# Altium PCB FuenteCapacitiva.PcbDoc
Units mm, origin at the board's own origin, x right, y up, seen from the top; angles counter-clockwise.
Board outline 152.4 x 101.6 mm, 2 copper layers (Top Layer, Bottom Layer); 15 components, 9 nets, 34 pads, 0 vias.
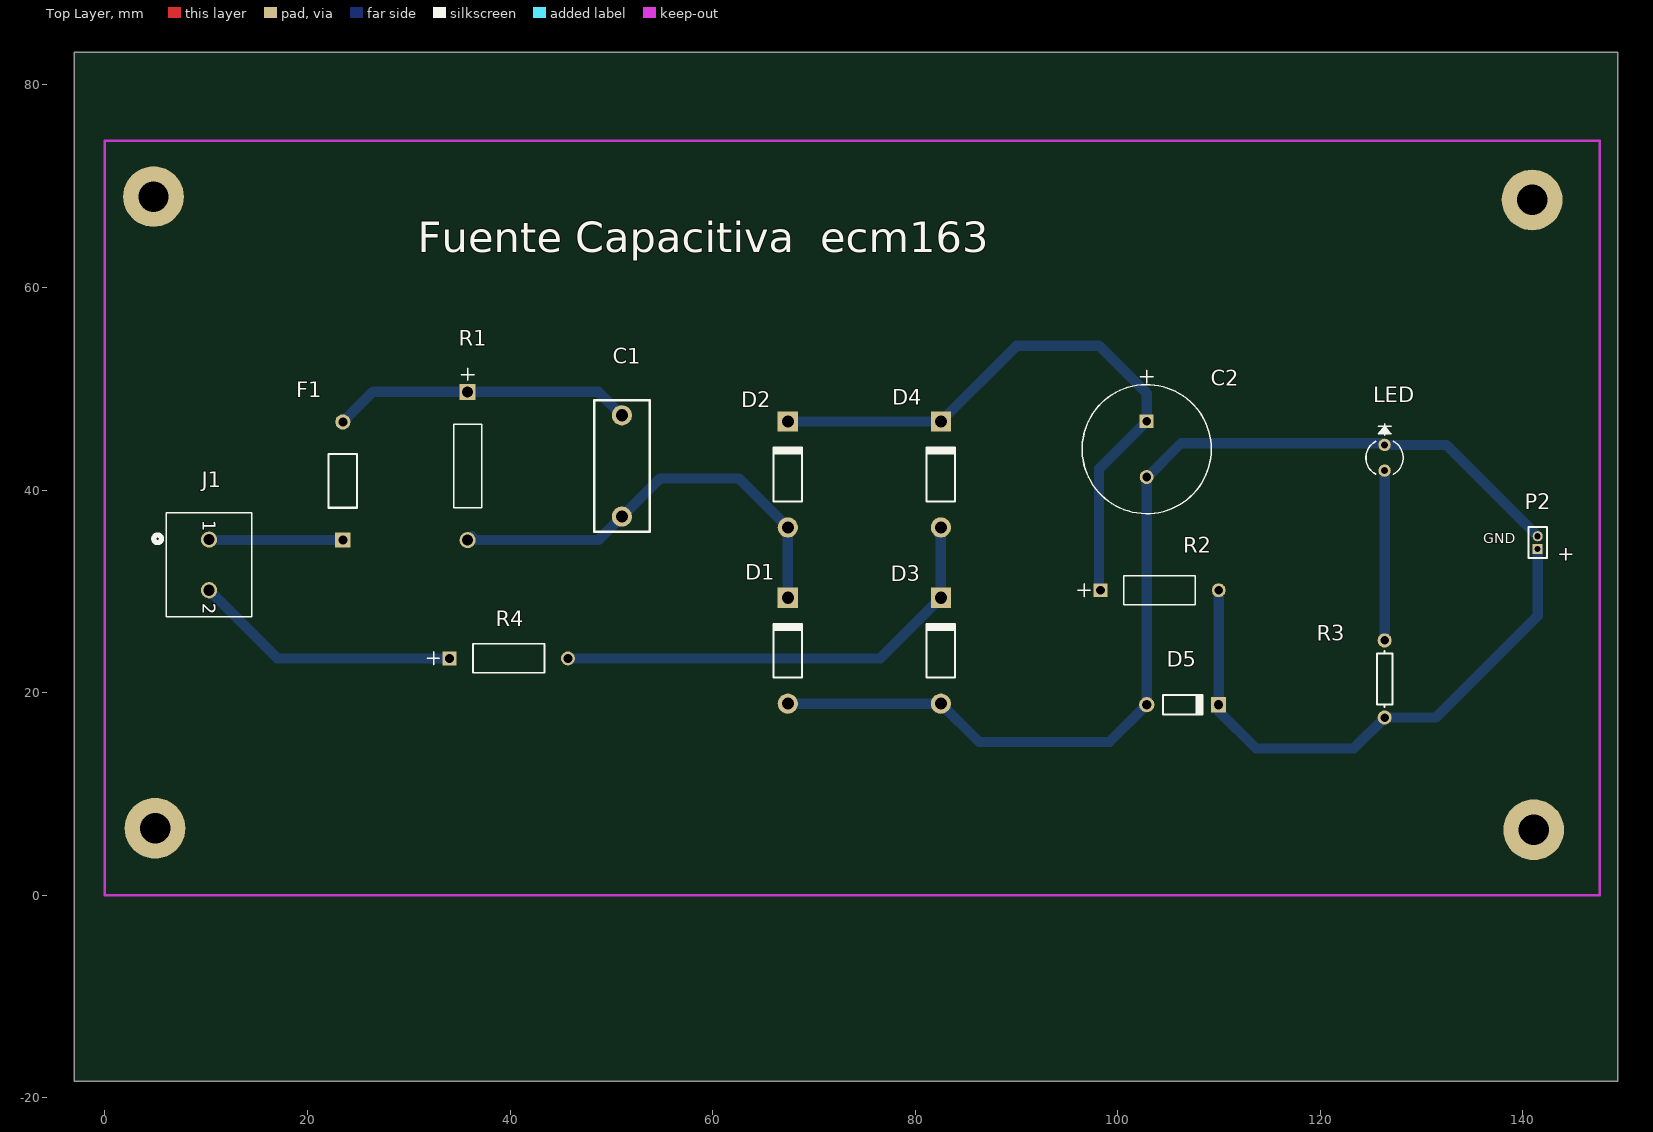
[diagram p0: Top Layer view]
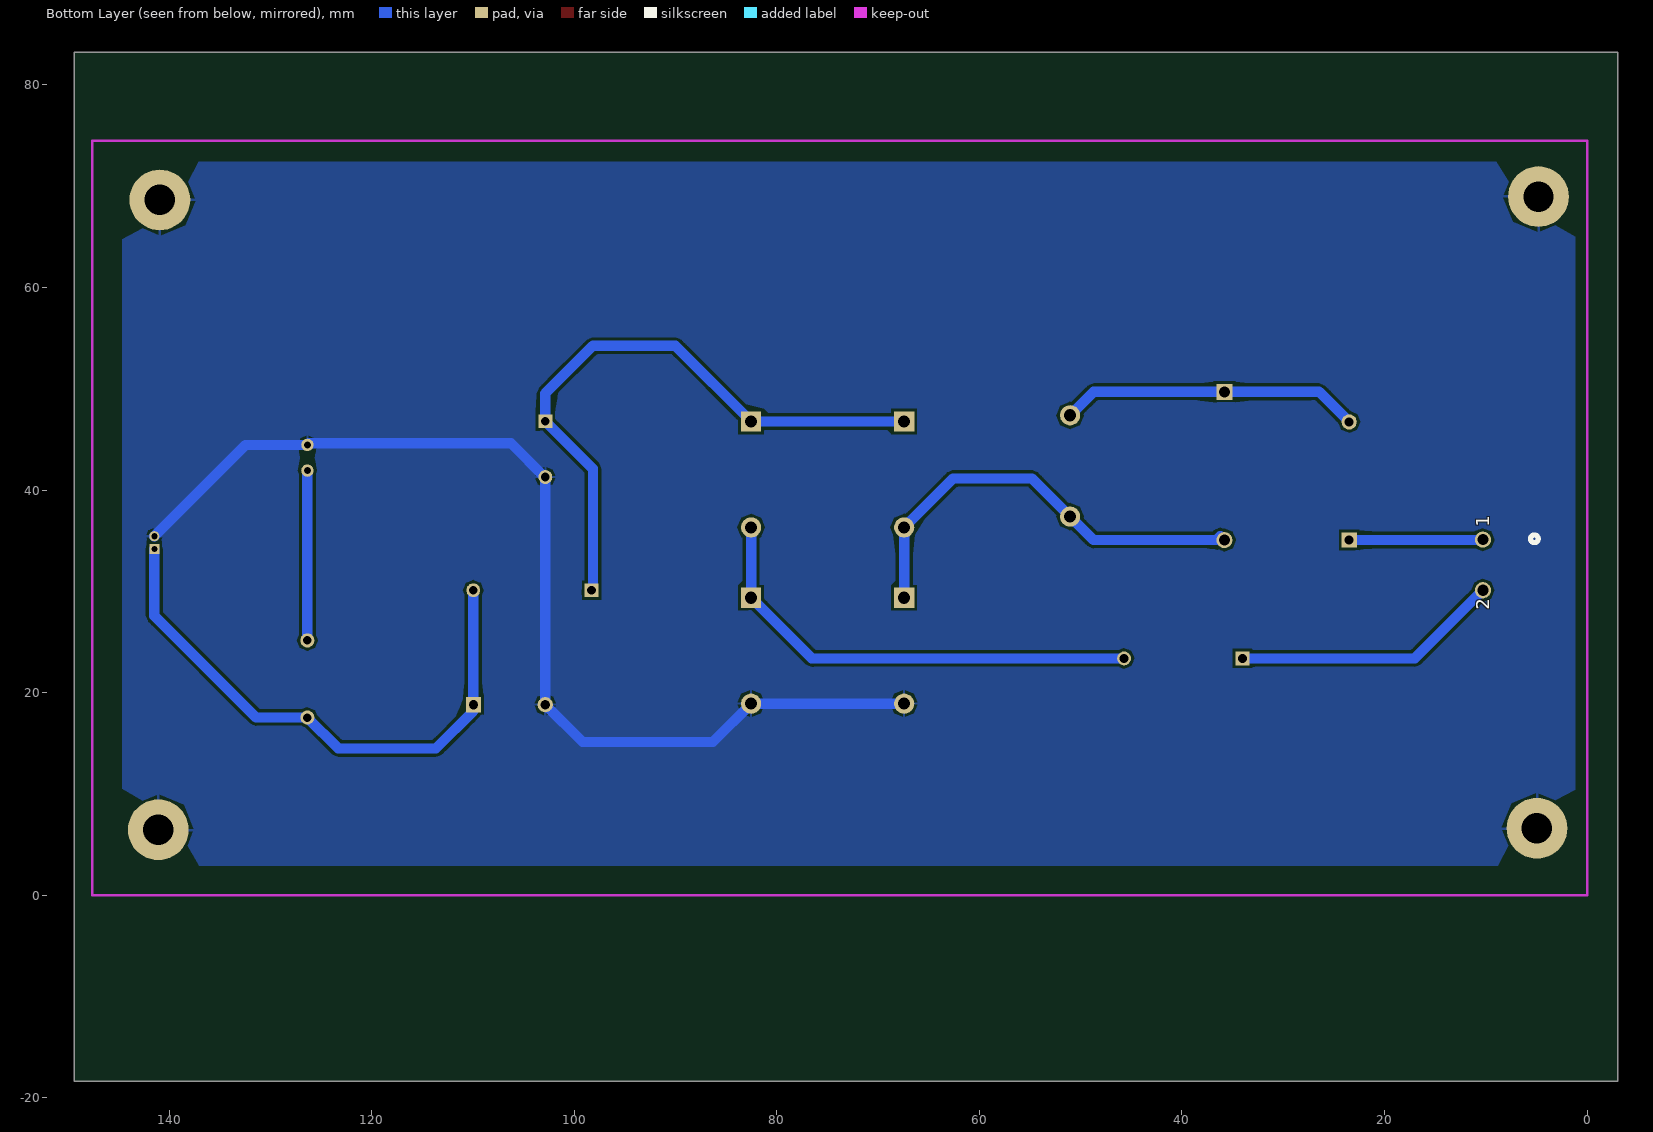
[diagram p1: Bottom Layer view, seen from below]

## Layer stack, top to bottom
Top Solder: solder mask 0.0102, Solder Resist, Dk 3.5
Top Layer: signal copper 0.0356
Dielectric 1: dielectric 0.32, FR-4, Dk 4.8
Bottom Layer: signal copper 0.0356
Bottom Solder: solder mask 0.0102, Solder Resist, Dk 3.5

## Board outline
-3.025,-18.375 149.375,-18.375 149.375,83.225 -3.025,83.225

## Design rules (kind name [scope] priority, off if disabled: settings)
Clearance [All] p1: gap=0.254
PolygonConnect [All] p1: connectstyle=Relief reliefconductorwidth=0.254 reliefentries=4 polygonreliefangle="90 Angle" airgapwidth=0.254
RoutingVias [All] p1: holewidth=0.711 width=1.27 viastyle="Through Hole" minholewidth=0.711 minwidth=1.27 maxholewidth=0.711 maxwidth=1.27
SolderMaskExpansion [All] p1: expansion=0.102
UnpouredPolygon [All] p1: allowunpoured=FALSE
Width [All] p1: maxlimit=2.032 minlimit=0.508 preferedwidth=1.016
29 further rules are at their usual default settings.

## Classes and differential pairs
component class FuenteCapacitiva: C1 C2 D1 D2 D3 D4 D5 F1 LED P2 R1 R2 R3 R4

## Components (designator, comment, footprint, x,y, rotation, side; value= is the part's Value field where it differs from the comment)
C1 "Cap" Cap470n400v 51.049,47.379 r270 top
C2 "1000uF 50v" "CAP_12.5 X 25" 102.865,41.283 r270 top
D1 "1N4007" DO-41 67.432,24.138 r90 top
D2 "1N4007" DO-41 67.432,41.537 r90 top
D3 "1N4007" DO-41 82.545,24.138 r90 top
D4 "1N4007" DO-41 82.545,41.537 r90 top
D5 "1N5231B" DO-35 106.421,18.804 r0 top
F1 "Fuse 5A" PIN-W2/E2.8 23.49,40.902 r90 top
J1 "282836-2" CONN2_282836-2 10.282,30.107 r270 top
LED "" HLMP 126.36,41.918 r270 top
P2 "MHDR1X2" MHDR1X2 141.473,34.171 r90 top
R1 "270k 1w" PR01 35.809,35.06 r270 top
R2 "100R 1W" YAG_FMP100 109.977,30.107 r0 top
R3 "Res1" AXIAL-0.3 126.36,21.344 r90 top
R4 "100R 1W" YAG_FMP100 45.715,23.376 r0 top

## Footprints (in the part's own frame and the unit in brackets; to place one, negate y for a bottom-side part, rotate by r counter-clockwise, add the part's x,y. Pads: shape width x height; smd on the part's side, far side on the other; paste and mask are expansions set on the pad)
AXIAL-0.3 [mm] "Axial Device, Thru-Hole; 2 Leads; 0.3 in Pin Spacing"
  round 1.4 hole 0.85: 1(-3.81,0) 2(3.81,0)
  silkscreen extent -2.77,-0.76 2.77,0.76
Cap470n400v [mm]
  round 2 hole 1.2: 1(0,0) 2(10,0)
  silkscreen extent -1.5,-2.75 11.5,2.75
"CAP_12.5 X 25" [mil]
  rect 54x54 hole 34 mask+0: 1(-217,0)
  round 54 hole 34 mask+0: 2(0,0)
  silkscreen extent -414,-251 142,251, body extent 0,0 10,10, height 10
CONN2_282836-2 [mil]
  round 63 hole 43 mask+0: 1(-196.85,0) 2(0,0)
  silkscreen extent -300,-215 104,166, body extent 0,0 10,10, height 10
DO-35 [mm] "Diode, Axial; Body 3.8 x 1.9 mm (LxDia. max), Lead Dia. 0.53 mm (max)"
  round 1.5 hole 0.9: 1(-3.55,0)
  rect 1.5x1.5 hole 0.9: 2(3.55,0)
  silkscreen extent -1.95,-0.95 2.05,0.95
DO-41 [mm] "Diode, Axial; Body 5.2 x 2.7 mm (LxDia. max), Lead Dia. 0.86 mm (max)"
  round 2 hole 1.2: 1(-5.23,0)
  rect 2x2 hole 1.2: 2(5.23,0)
  silkscreen extent -2.65,-1.4 2.75,1.4
HLMP [mil]
  round 48 hole 28 mask+0: 1(-100,0) 2(0,0)
  silkscreen extent -182,-72 14,72, body extent 0,0 10,10, height 10
MHDR1X2 [mm] "Connector; Header; 2 Position"
  rect 1x1 hole 0.6: 1(0,0)
  round 1 hole 0.6: 2(1.27,0)
  silkscreen extent -0.9,-0.9 2.17,0.9
PIN-W2/E2.8 [mm] "Thru-Hole; 2 Leads"
  rect 1.5x1.5 hole 0.9: 1(-5.825,0)
  round 1.5 hole 0.9: 2(5.825,0)
  silkscreen extent -2.65,-1.4 2.65,1.4
PR01 [mil]
  rect 62.68x62.68 hole 43 mask+0: 1(-576.38,0)
  round 62.68 hole 43 mask+0: 2(0,0)
  silkscreen extent -668,-54 -126,54, body extent 0,0 10,10, height 10
YAG_FMP100 [mil]
  rect 54x54 hole 34 mask+0: 1(-460,0)
  round 54 hole 34 mask+0: 2(0,0)
  silkscreen extent -547,-56 -91,56, body extent 0,0 10,10, height 10

## Part data
C1: "Capacitor"
C2: library part UVY1H102MHD, "Imported"
D1 D2 D3 D4: "1.0 Ampere General Purpose Rectifier"
D5: "Half Watt Zener"
F1: library part "Fuse 1", "Fuse"
J1: "TERMI-BLOK PCB MOUNT  90 2P."
LED: library part HLMP-1301, "Imported"
P2: "Header, 2-Pin"
R1: library part PR01000104703JR5, "Imported"
R2 R4: library part FMP100JR-52-100R, "Imported"
R3: "Resistor"

## Free pads (board coordinates)
  round 6 hole 3: 0(4.8,68.975) 1(140.925,68.65) 2(4.95,6.6) 3(141.075,6.45)

## Nets (pads, with @x,y where several pads share a name; then routed paths per layer and width w, separated by ;. In a path a pad name is that pad's centre, name@x,y a point inside that pad or via, vN(x,y) a via of type N, cw(c..) or ccw(c..) an arc to the next point about the centre after c; other vN are vias at no path point)
GND: C2.2 D1.1 D3.1 D5.1 LED.1 P2.2 pad.0 pad.1 pad.2 pad.3 | length 104.6
  Bottom Layer w1.016: D1.1 D3.1 86.332,15.121 99.188,15.121 D5.1 102.871,41.277 C2.2 102.908,41.283 106.25,44.625 LED.1@126.193,44.625 ; LED.1 132.456,44.458 P2.2
NetC1_1: C1.1 F1.2 R1.1 | length 29.8
  Bottom Layer w1.016: F1.2 26.463,49.7 R1.1 48.728,49.7 C1.1
NetC1_2: C1.2 D1.2 D2.1 R1.2 | length 43.8
  Bottom Layer w1.016: R1.2@36.333,35.348 36.215,35.466 R1.2 48.73,35.06 C1.2 54.82,41.15 62.589,41.15 D2.1 D1.2
NetC2_1: C2.1 D2.2 D4.2 R2.1 | length 62
  Bottom Layer w1.016: D2.2 D4.2 90.015,54.237 98.166,54.237 102.865,49.538 C2.1 98.166,42.096 98.166,30.361 R2.1@98.42,30.107
NetD3_2: D3.2 D4.1 R4.2 | length 46.3
  Bottom Layer w1.016: R4.2 76.553,23.376 D3.2 D4.1
NetD5_2: D5.2 P2.1 R2.2 R3.1 | length 57
  Bottom Layer w1.016: R2.2 109.977,18.81 D5.2 109.971,18.175 113.66,14.486 123.312,14.486 R3.1 131.409,17.534 141.473,27.598 P2.1
NetF1_1: F1.1 J1.1 | length 13.2
  Bottom Layer w1.016: J1.1 10.312,35.077 F1.1
NetJ1_2: J1.2 R4.1 | length 26.5
  Bottom Layer w1.016: J1.2 17.013,23.376 R4.1
NetLED_2: LED.2 R3.2 | length 16.8
  Bottom Layer w1.016: R3.2 LED.2

## Polygon pours and split planes (outlines as drawn)
GND on Bottom Layer "GND" (solid, pour order 4): 144.625,2.9 144.625,72.225 144.425,72.425 1.15,72.425 1.15,3.275 1.525,2.9 1.15,2.9

## Keep-outs
Keep-Out Layer:
  lines w0.254: 0,0 0,74.5 147.6,74.5 147.6,64.6 147.6,0 0,0

## Silkscreen, mask and mechanical layers (free items; w line width, h text height)
Top Overlay:
  text "Fuente Capacitiva  ecm163" at 30.9,63.5 h3
  text "GND" at 136.1,34.75 h1
  text "+" at 143.425,33 h1.52

## Text inside footprints (layer, text, board x,y; h text height)
J1: Top Overlay "1" at 9.647,37.025 h1.27 r270; Top Overlay "1" at 9.647,37.025 h1.27 r270; Top Overlay "2" at 9.647,28.824 h1.27 r270; Top Overlay "2" at 9.647,28.824 h1.27 r270; Mechanical 13 "1" at 9.647,37.025 h1.27 r270; Mechanical 13 "1" at 9.647,37.025 h1.27 r270; Mechanical 13 "2" at 9.647,28.824 h1.27 r270; Mechanical 13 "2" at 9.647,28.824 h1.27 r270; Bottom Overlay "1" at 9.647,36.39 h1.27 r270; Bottom Overlay "1" at 9.647,36.39 h1.27 r270; Bottom Overlay "2" at 9.647,28.189 h1.27 r270; Bottom Overlay "2" at 9.647,28.189 h1.27 r270